# Altium PCB HV.PcbDoc
Units mm, origin at the board's own origin, x right, y up, seen from the top; angles counter-clockwise.
Board outline 28.62 x 18.13 mm, 2 copper layers (Top Layer, Bottom Layer), stack 1.021 mm thick; 35 components, 19 nets, 101 pads, 44 vias.
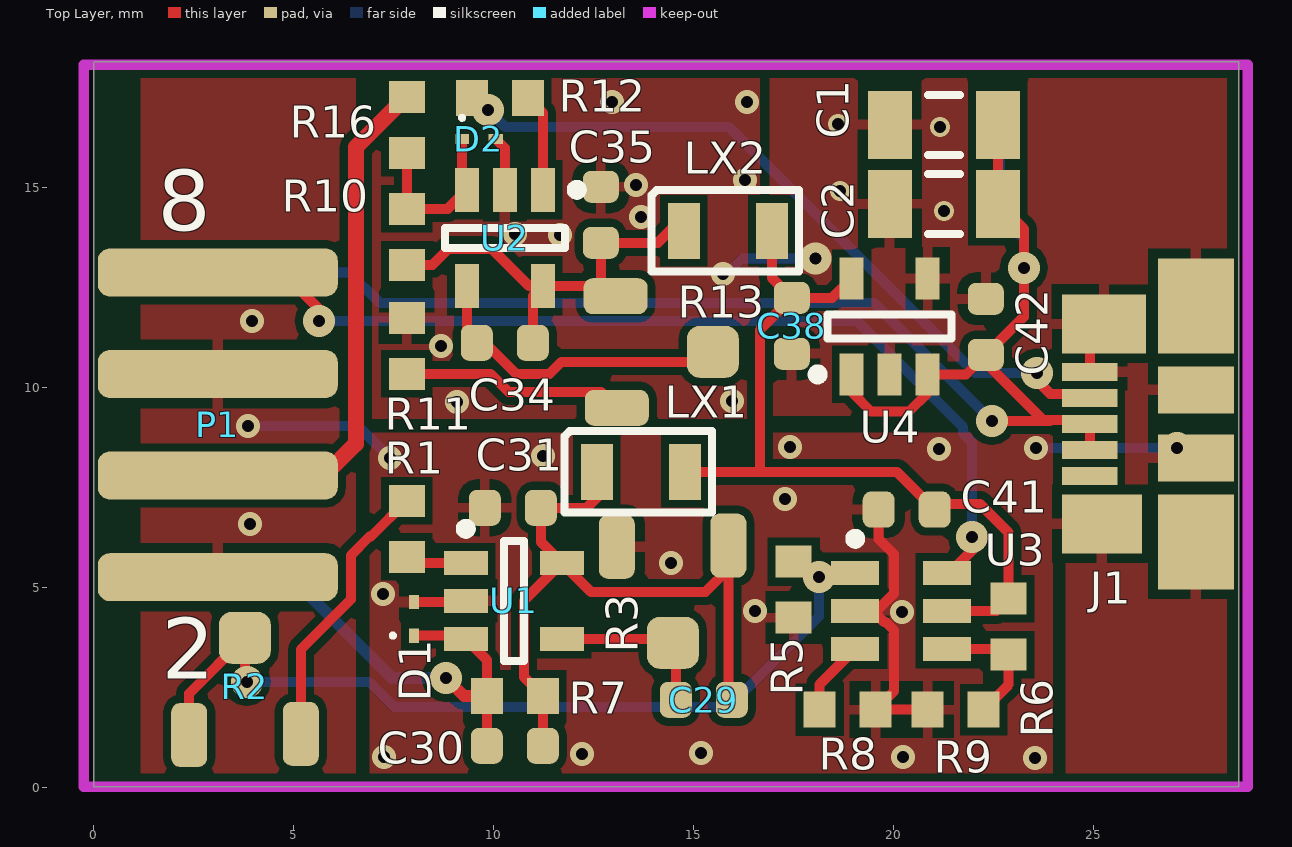
[diagram p0: Top Layer view]
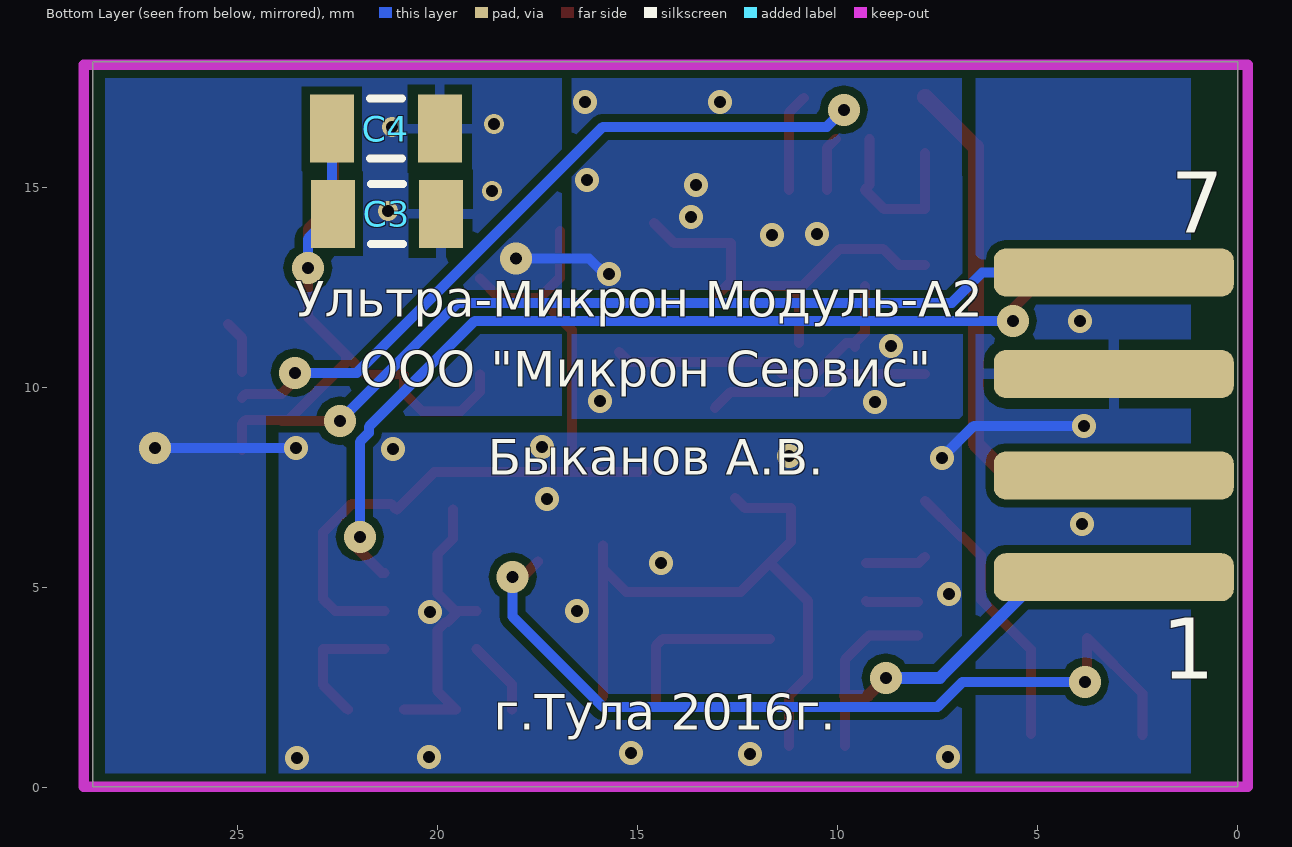
[diagram p1: Bottom Layer view, seen from below]

## Layer stack, top to bottom
Top Solder: solder mask 0.0102, Solder Resist, Dk 3.5
Top Layer: signal copper 0.0356
Dielectric1: dielectric 0.95, FR-4, Dk 4.8
Bottom Layer: signal copper 0.0356
Bottom Solder: solder mask 0.0102, Solder Resist, Dk 3.5

## Board outline
0,0.025 28.625,0.025 28.625,18.15 0,18.15

## Design rules (kind name [scope] priority, off if disabled: settings)
BoardOutlineClearance [All] p1: gap=0.3
Clearance [All] p1: gap=0.2
ComponentClearance [All] p1: gap=0.1 collisioncheckmode=3 verticalgap=0.254 showdistances=TRUE
HoleSize [All] p1: absolutevalues=TRUE maxlimit=2.54 minlimit=0.3 maxpercent=80.000 minpercent=20.000
HoleToHoleClearance [All] p1: gap=0.152 allowstackedmicrovias=TRUE
MinimumAnnularRing [All] p1: minimumring=0.15
MinimumSolderMaskSliver [All] p1: minsoldermaskwidth=0.152
PlaneClearance [All] p1: clearance=2
PlaneConnect [All] p1: planeconnectstyle=Relief reliefexpansion=0.457 reliefentries=4 reliefconductorwidth=0.3 reliefairgap=0.457
PolygonConnect PolygonConnect_via [IsVia] p1: connectstyle=Direct reliefconductorwidth=0.254 reliefentries=4 polygonreliefangle="90 Angle" airgapwidth=0.254
PolygonConnect [All] p2: connectstyle=Relief reliefconductorwidth=0.254 reliefentries=4 polygonreliefangle="90 Angle" airgapwidth=0.254
RoutingVias [All] p1: holewidth=0.3 width=0.62 viastyle="Through Hole" minholewidth=0.3 minwidth=0.62 maxholewidth=6 maxwidth=4
SilkToSilkClearance [All] p1: silktosilkclearance=0.152
SilkToSolderMaskClearance SilkscreenOverComponentPads [IsPad] p1: minsilkscreentomaskgap=0.1 clearancetoexposedcopper=TRUE
SolderMaskExpansion [All] p1: expansion=0.1
Width [All] p1: maxlimit=2.254 minlimit=0.2 preferedwidth=0.25
22 further rules are at their usual default settings.

## Components (designator, comment, footprint, x,y, rotation, side; value= is the part's Value field where it differs from the comment)
C1 "47uF" C1206 21.25,16.575 r180 top
C2 "47uF" C1206 21.25,14.6 r180 top
C3 "47uF" C1206 21.275,14.35 r180 bottom
C4 "47uF" C1206 21.3,16.477 r180 bottom
C29 "1nF" 1608[0603]_CAP 15.25,2.2 r180 top
C30 "47pF" 1608[0603]_CAP 10.525,1.05 r180 top
C31 "1uF" 1608[0603]_CAP 10.475,7 r180 top
C34 "1nF" 1608[0603]_CAP 10.275,11.125 r180 top
C35 "1uF" 1608[0603]_CAP 12.675,14.325 r90 top
C38 "1uF" 1608[0603]_CAP 17.45,11.55 r90 top
C41 "1uF" 1608[0603]_CAP 20.323,6.953 r180 top
C42 "1uF" 1608[0603]_CAP 22.3,11.525 r90 top
D1 "ESD9R3.3ST5G" ONSC-SOD-923-2-514AB-01_V 8,4.225 r90 top
D2 "ESD9R3.3ST5G" ONSC-SOD-923-2-514AB-01_V 9.625,16.225 r0 top
J1 "Micro-USB" 47346-0001 24.15,9.1 r90 top
LX1 "22uH" Resistor 13.675,7.9 r180 top
LX2 "22uH" Resistor 15.85,13.925 r180 top
P1 "Header 4X2" PLS_FLAT_CONN 3.1,9.075 r0 top
R1 "47K" 1608[0603] 7.825,6.475 r270 top
R2 "100K" 3223W 3.775,3.75 r0 top
R3 "100K" 3223W 14.475,3.625 r180 top
R5 "6.98K" 1608[0603] 17.498,4.953 r270 top
R6 "976K" 1608[0603] 22.873,4.028 r270 top
R7 "6,04M" 1608[0603] 10.525,2.3 r180 top
R8 "150K" 1608[0603] 18.848,1.953 r0 top
R9 "182K" 1608[0603] 21.548,1.953 r180 top
R10 "1M" 1608[0603] 7.825,13.775 r270 top
R11 "976K" 1608[0603] 7.825,11.05 r270 top
R12 "49.9R" 1608[0603] 10.15,17.25 r0 top
R13 "100K" 3223W 15.475,10.9 r270 top
R16 "100K" 1608[0603] 7.825,16.575 r270 top
U1 "AD8541ARTZ" ADI-RJ-5_N 10.5,4.675 r0 top
U2 "AD8541ARTZ" ADI-RJ-5_N 10.275,13.75 r270 top
U3 "LTC6992" SOT23-6L 20.186,4.425 r0 top
U4 "TPS78326DDCT" TI-DDC5_N 19.898,11.534 r90 top

## Footprints (in the part's own frame and the unit in brackets; to place one, negate y for a bottom-side part, rotate by r counter-clockwise, add the part's x,y. Pads: shape width x height; smd on the part's side, far side on the other; paste and mask are expansions set on the pad)
1608[0603] [mm] "Chip Capacitor, Body 1.6x0.8mm, IPC High Density"
  rect 0.8x0.9 smd: 1(-0.7,0) 2(0.7,0)
  body extent -0.87,-0.48 0.87,0.48, height 1.3
1608[0603]_CAP [mm] "Chip Capacitor, Body 1.6x0.8mm, IPC High Density"
  rrect50% 0.8x0.9 smd: 1(-0.7,0) 2(0.7,0)
  body extent -0.85,-0.45 0.85,0.45, height 0.8
3223W [mm]
  rrect50% 0.9x1.6 smd: 1(-1.39,-2.43) 2(1.4,-2.4)
  rrect50% 1.3x1.3 smd: 3(0,0)
  body extent -1.97,-3.19 1.97,0.59, height 3.9
47346-0001 [mm] "Molex Mico-USB"
  rect 0.45x1.38 smd: 1(-1.3,-0.75) 2(-0.65,-0.75) 3(0,-0.75) 4(0.65,-0.75) 5(1.3,-0.75)
  rect 1.475x2 smd: MH1(-2.5,-1.05)
  rect 1.475x2.1 smd: MH2(2.5,-1.1)
  rect 2.375x1.9 smd: MH3(-2.95,-3.4) MH4(2.95,-3.4)
  rect 1.175x1.9 smd: MH3(-0.85,-3.4) MH4(0.85,-3.4)
  body extent -3.95,-5.52 4.03,-0.09, height 2.77
ADI-RJ-5_N [mm] "SOT-23, 5-Leads, Body 2.9x1.6mm, Pitch 0.95mm, IPC Medium Density"
  rect 1.1x0.6 smd: 1(-1.2,0.95) 2(-1.2,0) 3(-1.2,-0.95) 4(1.2,-0.95) 5(1.2,0.95)
  silkscreen extent -1.32,-1.5 0.25,1.92, body extent -0.85,-1.5 0.85,1.5, height 1.45
C1206 [mm] "Chip Capacitor, Body 3.2x1.6mm, IPC High Density"
  rect 1.1x1.7 smd: 1(-1.35,0) 2(1.35,0)
  silkscreen extent -0.4,-0.75 0.4,0.75, body extent -1.7,-0.9 1.7,0.9, height 1.3
ONSC-SOD-923-2-514AB-01_V [mm] "SOD, 2-Leads, Body 0.8x0.6mm"
  rect 0.36x0.25 smd: 1(-0.42,0) 2(0.42,0)
  silkscreen extent -0.47,0.48 -0.37,0.57, body extent -0.4,-0.3 0.4,0.3, height 0.4
PLS_FLAT_CONN [mm]
  rrect50% 6x1.2 smd far side: 1(0,-3.81) 3(0,-1.27) 5(0,1.27) 7(0,3.81)
  rrect50% 6x1.2 smd: 2(0,-3.81) 4(0,-1.27) 6(0,1.27) 8(0,3.81)
Resistor [mm]
  rect 0.8x1.4 smd: 1(-1.1,0) 2(1.1,0)
  silkscreen extent -1.78,-1.02 1.91,1.02, body extent -1.1,-0.7 1.2,0.7, height 1
SOT23-6L [mm]
  rect 1.2x0.6 smd: 1(-1.15,0.95) 2(-1.15,0) 3(-1.15,-0.95) 4(1.15,-0.95) 5(1.15,0) 6(1.15,0.95)
  silkscreen extent -1.27,1.68 -1.02,1.92, body extent -0.75,-1.52 0.75,1.53, height 1.45
TI-DDC5_N [mm] "SOT23, 5-Leads, Body 2.9x1.6mm, Pitch 0.95mm, IPC Medium Density"
  rect 1.05x0.6 smd: 1(-1.2,0.95) 2(-1.2,0) 3(-1.2,-0.95) 4(1.2,-0.95) 5(1.2,0.95)
  silkscreen extent -1.32,-1.55 0.3,1.92, body extent -0.87,-1.52 0.87,1.53, height 1.1

## Part data
C1 C2 C3 C4 C29 C30 C31 C34 C35 C38 C41 C42: library part "Cap Semi", "Capacitor (Semiconductor SIM Model)"
D1 D2: "Transient Voltage Suppressor, ESD Protection Diode with Ultra-Low Leakage, 2-Pin SOD-923, Pb-Free, Tape and Reel"
J1: library part 0481900001, "USB On-The-Go (OTG) Mini-B Receptacle, Right Angle, SMT, 0.80mm (.031\") Pitch, Solder Tabs with Back Cover, Recessed Type"
LX1 LX2 R1 R5 R6 R7 R8 R9 R10 R11 R12 R16: library part "Resistor 0805"
P1: "Header, 4-Pin, Dual row"
R2 R3 R13: library part "Res Tap", "Tapped Resistor"
U1 U2: library part AD8541ARTZ-R2, "Single Channel RRIO Operational Amplifier, 1 MHz BW, 920 mV/us SR, Industrial, 5-pin SOT23 (RJ-5), Reel"
U4: library part TPS78330DDCR, "Single Output LDO, 150 mA, Fixed 3 V Output, 2.2 to 5.5 V Input, with Ultra-Low IQ, 5-pin SOT (DDC), -40 to 105 degC, Green (RoHS & no Sb/Br)"

## Via types
v1: diameter 0.6, hole 0.3, Top Layer to Bottom Layer, tented both sides, 29 vias
v2: diameter 0.8, hole 0.3, Top Layer to Bottom Layer, tented both sides, 11 vias
v3: diameter 0.5, hole 0.3, Top Layer to Bottom Layer, tented both sides, 4 vias

## Nets (pads, with @x,y where several pads share a name; then routed paths per layer and width w, separated by ;. In a path a pad name is that pad's centre, name@x,y a point inside that pad or via, vN(x,y) a via of type N, cw(c..) or ccw(c..) an arc to the next point about the centre after c; other vN are vias at no path point)
ANODE: P1.4 R16.1 | length 13
  Top Layer w0.4: P1.4 5.755,7.805 6.55,8.6 6.55,16.016 7.809,17.275 R16.1
GND: C1.2 C2.2 C3.2 C4.2 C31.2 C35.2 C38.1 C41.2 C42.2 D1.2 D2.2 J1.5 J1.MH1 J1.MH2 J1.MH3 J1.MH4 P1.2 P1.5 P1.6 R3.2 R5.2 R8.2 R9.2 R11.1 U1.2 U2.2 U3.2 U4.2 U4.4 | length 21.6
  Top Layer w0.25: D1.2 9.27,4.645 U1.2 ; D2.2 10.275,15.995 U2.2 ; U3.2 U3.2@19.476,4.425 ; C41.2 19.623,6.219 20.011,5.83 20.011,4.861 19.575,4.425 U3.2@19.476,4.425 ; R9.2 R8.2 20.011,2.416 20.011,3.93 19.792,4.15 19.751,4.15 U3.2@19.476,4.425 ; J1.5 24.9,11.25 J1.MH2 ; v2(27.075,8.5) J1.MH3@27.125,8.45
  Bottom Layer w0.25: v1(3.85,9.05) 6.6,9.05 v1(7.4,8.25) ; v1(15.725,12.85) 15.833,12.85 16.216,13.234 v2(18.048,13.234) ; v1(23.55,8.5) v2(27.075,8.5)
  other v1: 23.525,0.75 7.25,0.775 20.225,0.775 12.2,0.85 15.175,0.875 20.2,4.4 16.525,4.425 7.225,4.85 14.425,5.625 3.9,6.6 17.275,7.225 11.225,8.3 21.125,8.475 17.4,8.525 9.075,9.65 15.95,9.675 8.675,11.05 3.95,11.675 10.525,13.85 11.65,13.825 13.675,14.275 13.55,15.075 16.275,15.2 12.95,17.15 16.325,17.15
  other v3: 21.25,14.425 18.65,14.925 21.15,16.525 18.6,16.6
HV_IN: C30.2 D1.1 P1.1 R7.2 U1.3 | length 11.5
  Top Layer w0.25: D1.1 9.22,3.805 U1.3 9.825,3.2 R7.2 C30.2
  Top Layer w0.3: v2(8.8,2.75) 9.25,2.3 R7.2
  Bottom Layer w0.3: P1.1@3.775,5.265 4.935,5.265 7.45,2.75 v2(8.8,2.75)
NetC29_1: C29.1 C30.1 C31.1 LX1.2 R3.1 R7.1 U1.5 | length 16.8
  Top Layer w0.25: C30.1 R7.1@11.225,2.2 ; R7.1 10.75,2.775 10.75,4.675 U1.5 ; LX1.2@12.575,7.25 12.325,7 C31.1 11.175,6.15 U1.5 ; R3.1 R3.1@15.865,5.47 ; C29.1 15.865,2.285 R3.1@15.865,5.47 ; U1.5 12.425,4.9 15.295,4.9 R3.1@15.865,5.47
NetC29_2: C29.2 R3.3 U1.4 | length 4.3
  Top Layer w0.25: U1.4 14.375,3.725 R3.3 14.55,3.55 C29.2
NetC34_1: C34.1 C35.1 LX2.2 R10.2 R13.1 U2.5 | length 10.7
  Top Layer w0.25: R10.2 8.47,13.075 8.87,13.475 9.95,13.475 10.875,12.55 U2.5 ; C34.1 10.975,12.3 U2.5 ; R13.1 R13.1@12.785,12.55 ; LX2.2@14.6,14.125 14.1,13.625 C35.1 12.675,12.66 R13.1@12.785,12.55 ; U2.5 R13.1@12.785,12.55
NetC34_2: C34.2 R13.3 U2.4 | length 8.1
  Top Layer w0.25: U2.4 9.325,11.375 C34.2 ; C34.2@9.575,11.025 C34.2 ; R13.3 15.225,10.65 11.692,10.65 11.392,10.35 10.558,10.35 9.783,11.125 C34.2
NetD2_1: D2.1 R10.1 R16.2 U2.3 | length 4.4
  Top Layer w0.25: R16.2 R10.1 8.85,14.475 U2.3 9.205,15.07 D2.1
NetR1_1: R1.1 R2.2 | length 6.9
  Top Layer w0.25: R2.2 5.175,3.456 6.425,4.706 6.425,5.81 6.895,6.28 6.93,6.28 R1.1
NetR1_2: R1.2 U1.1 | length 1.5
  Top Layer w0.25: R1.2 7.975,5.625 U1.1
NetR2_1: R2.1 R2.3 R5.1 U3.1 | length 21.4
  Top Layer w0.25: R2.1 2.385,2.36 R2.3 3.775,2.7 v2(3.825,2.65) ; R5.1 17.876,5.275 v2(18.126,5.275)
  Bottom Layer w0.25: v2(3.825,2.65) 6.878,2.65 7.503,2.025 15.875,2.025 18.126,4.276 v2(18.126,5.275)
NetR6_2: R6.2 R9.1 U3.4 | length 3.3
  Top Layer w0.25: U3.4 22.873,3.475 R6.2 22.873,2.578 R9.1
NetR8_1: R8.1 U3.3 | length 1.9
  Top Layer w0.25: R8.1 18.148,2.587 U3.3
NetR11_2: R11.2 R13.2 | length 5.6
  Top Layer w0.25: R11.2 9.921,10.35 10.371,9.9 12.675,9.9 R13.2
NetR12_2: R12.2 U2.1 | length 2.5
  Top Layer w0.25: R12.2 11.225,16.875 U2.1
PULSE: P1.8 U3.6 | length 23.9
  Top Layer w0.25: P1.8@3.775,12.885 4.715,12.885 5.625,11.975 v2(5.625,11.675) ; U3.6 21.401,5.375 22.126,6.1 v2(21.951,6.275)
  Bottom Layer w0.25: v2(5.625,11.675) 19.075,11.675 21.725,9.025 21.725,8.875 21.951,8.649 v2(21.951,6.275)
SCINT: J1.4 R12.1 | length 18.4
  Top Layer w0.25: R12.1@9.65,17.05 9.75,16.95 v2(9.85,16.95) ; v2(23.575,10.375) 23.575,10.185 23.91,9.85 24.8,9.85 J1.4
  Bottom Layer w0.25: v2(9.85,16.95) 10.275,16.525 15.875,16.525 22.025,10.375 v2(23.575,10.375)
VCC: C38.2 C41.1 LX1.1 LX2.1 R6.1 U3.5 U4.5 | length 20.4
  Top Layer w0.25: LX1.1 16.625,7.9 ; LX2.1 16.95,12.75 C38.2 ; U4.5 18.464,12.25 C38.2 ; U3.5 22.57,4.425 R6.1 22.873,6.378 22.151,7.1 21.17,7.1 C41.1 20.076,7.9 16.625,7.9 ; 16.625,7.9 16.65,7.925 16.65,11.45 C38.2
VCC_IN: C1.1 C2.1 C3.1 C4.1 C42.1 J1.2 J1.3 P1.7 U4.1 U4.3 | length 41.5
  Top Layer w0.25: U4.1 18.948,9.893 19.432,9.409 20.384,9.409 20.848,9.873 U4.3 21.809,10.334 C42.1 ; v2(22.45,9.175) 23.9,9.175 23.925,9.2 ; C1.1 22.6,14.625 23.25,13.975 v2(23.25,13) 23.25,11.775 C42.1 ; J1.2 J1.3 24.8,9.2 23.925,9.2 ; C42.1 22.3,10.625 23.725,9.2 23.925,9.2
  Bottom Layer w0.25: P1.7 6.39,12.885 7.15,12.125 19.5,12.125 v2(22.45,9.175) ; C4.1 22.65,14.375 C3.1 23.25,13.725 v2(23.25,13)
pads on no net: J1.1 P1.3

## Polygon pours and split planes (outlines as drawn)
GND on Top Layer "Top Layer-No Net" (solid, pour order 61): 16.9,18.175 16.9,9.3 20.425,9.3 24.3,9.3 24.3,0.05 24.3,0.075 28.625,0.075 28.625,18.175
GND on Top Layer "Top Layer-No Net" (solid, pour order 65): 23.975,0.075 23.975,8.875 6.9,8.875 6.9,0.075 23.975,0.075
GND on Top Layer "Top Layer-No Net" (solid, pour order 57): 6.875,9.225 16.65,9.225 16.65,10.175 16.65,18.175 15.175,18.175 6.9,18.175 6.9,18.2
GND on Top Layer "Top Layer-No Net" (solid, pour order 69): 1.175,18.125 1.175,0.2 1.25,0.125 1.275,0.15 6.55,0.15 6.55,18.05 6.45,18.15
GND on Bottom Layer "Top Layer-No Net" (solid, pour order 59): 16.9,18.175 16.9,9.3 20.425,9.3 24.3,9.3 24.3,0.05 24.3,0.075 29.675,0.075 29.675,18.175
GND on Bottom Layer "Top Layer-No Net" (solid, pour order 55): 23.975,0.075 23.975,8.875 6.9,8.875 6.9,0.075 23.975,0.075
GND on Bottom Layer "Top Layer-No Net" (solid, pour order 63): 6.875,9.225 16.65,9.225 16.65,10.175 16.65,18.175 15.175,18.175 6.9,18.175 6.9,18.2
GND on Bottom Layer "Top Layer-No Net" (solid, pour order 67): 1.175,18.125 1.175,0.2 1.25,0.125 1.275,0.15 6.55,0.15 6.55,18.05 6.45,18.15

## Keep-outs
Keep-Out Layer:
  lines w0.254: -0.25,0.025 28.85,0.025 28.85,18.075 -0.25,18.075 -0.25,0.025

## Silkscreen, mask and mechanical layers (free items; w line width, h text height)
Top Overlay:
  text "8" at 1.6,13.925 h1.52
  text "2" at 1.7,2.725 h1.52
Bottom Overlay:
  text "7" at 1.675,13.875 h1.52
  text "Ультра-Микрон Модуль-А2" at 23.575,11.475 h1.52
  text "ООО \"Микрон Сервис\"" at 21.95,9.725 h1.52
  text "Быканов А.В." at 18.75,7.525 h1.52
  text "1" at 1.9,2.725 h1.52
  text "г.Тула 2016г." at 18.6,1.15 h1.52
Top Solder:
  rectangle: 24.6,0.375 28.325,4.525
  rectangle: 24.6,13.7 28.325,17.85
Bottom Solder:
  rectangle: 24.625,13.625 28.35,17.775
  rectangle: 24.675,0.25 28.4,4.4